# Altium PCB slave.PcbDoc (part 6 of 8)
Units mm, origin at the board's own origin, x right, y up, seen from the top; angles counter-clockwise.
Board outline 160 x 100 mm, 6 copper layers (Top, FUSED_VBAT-, Signals1, Signals2, SUPPLY, Bottom), stack 1.67 mm thick; 582 components, 375 nets, 1615 pads, 3043 vias.
Unrouted connection lines stored in the file: 1.
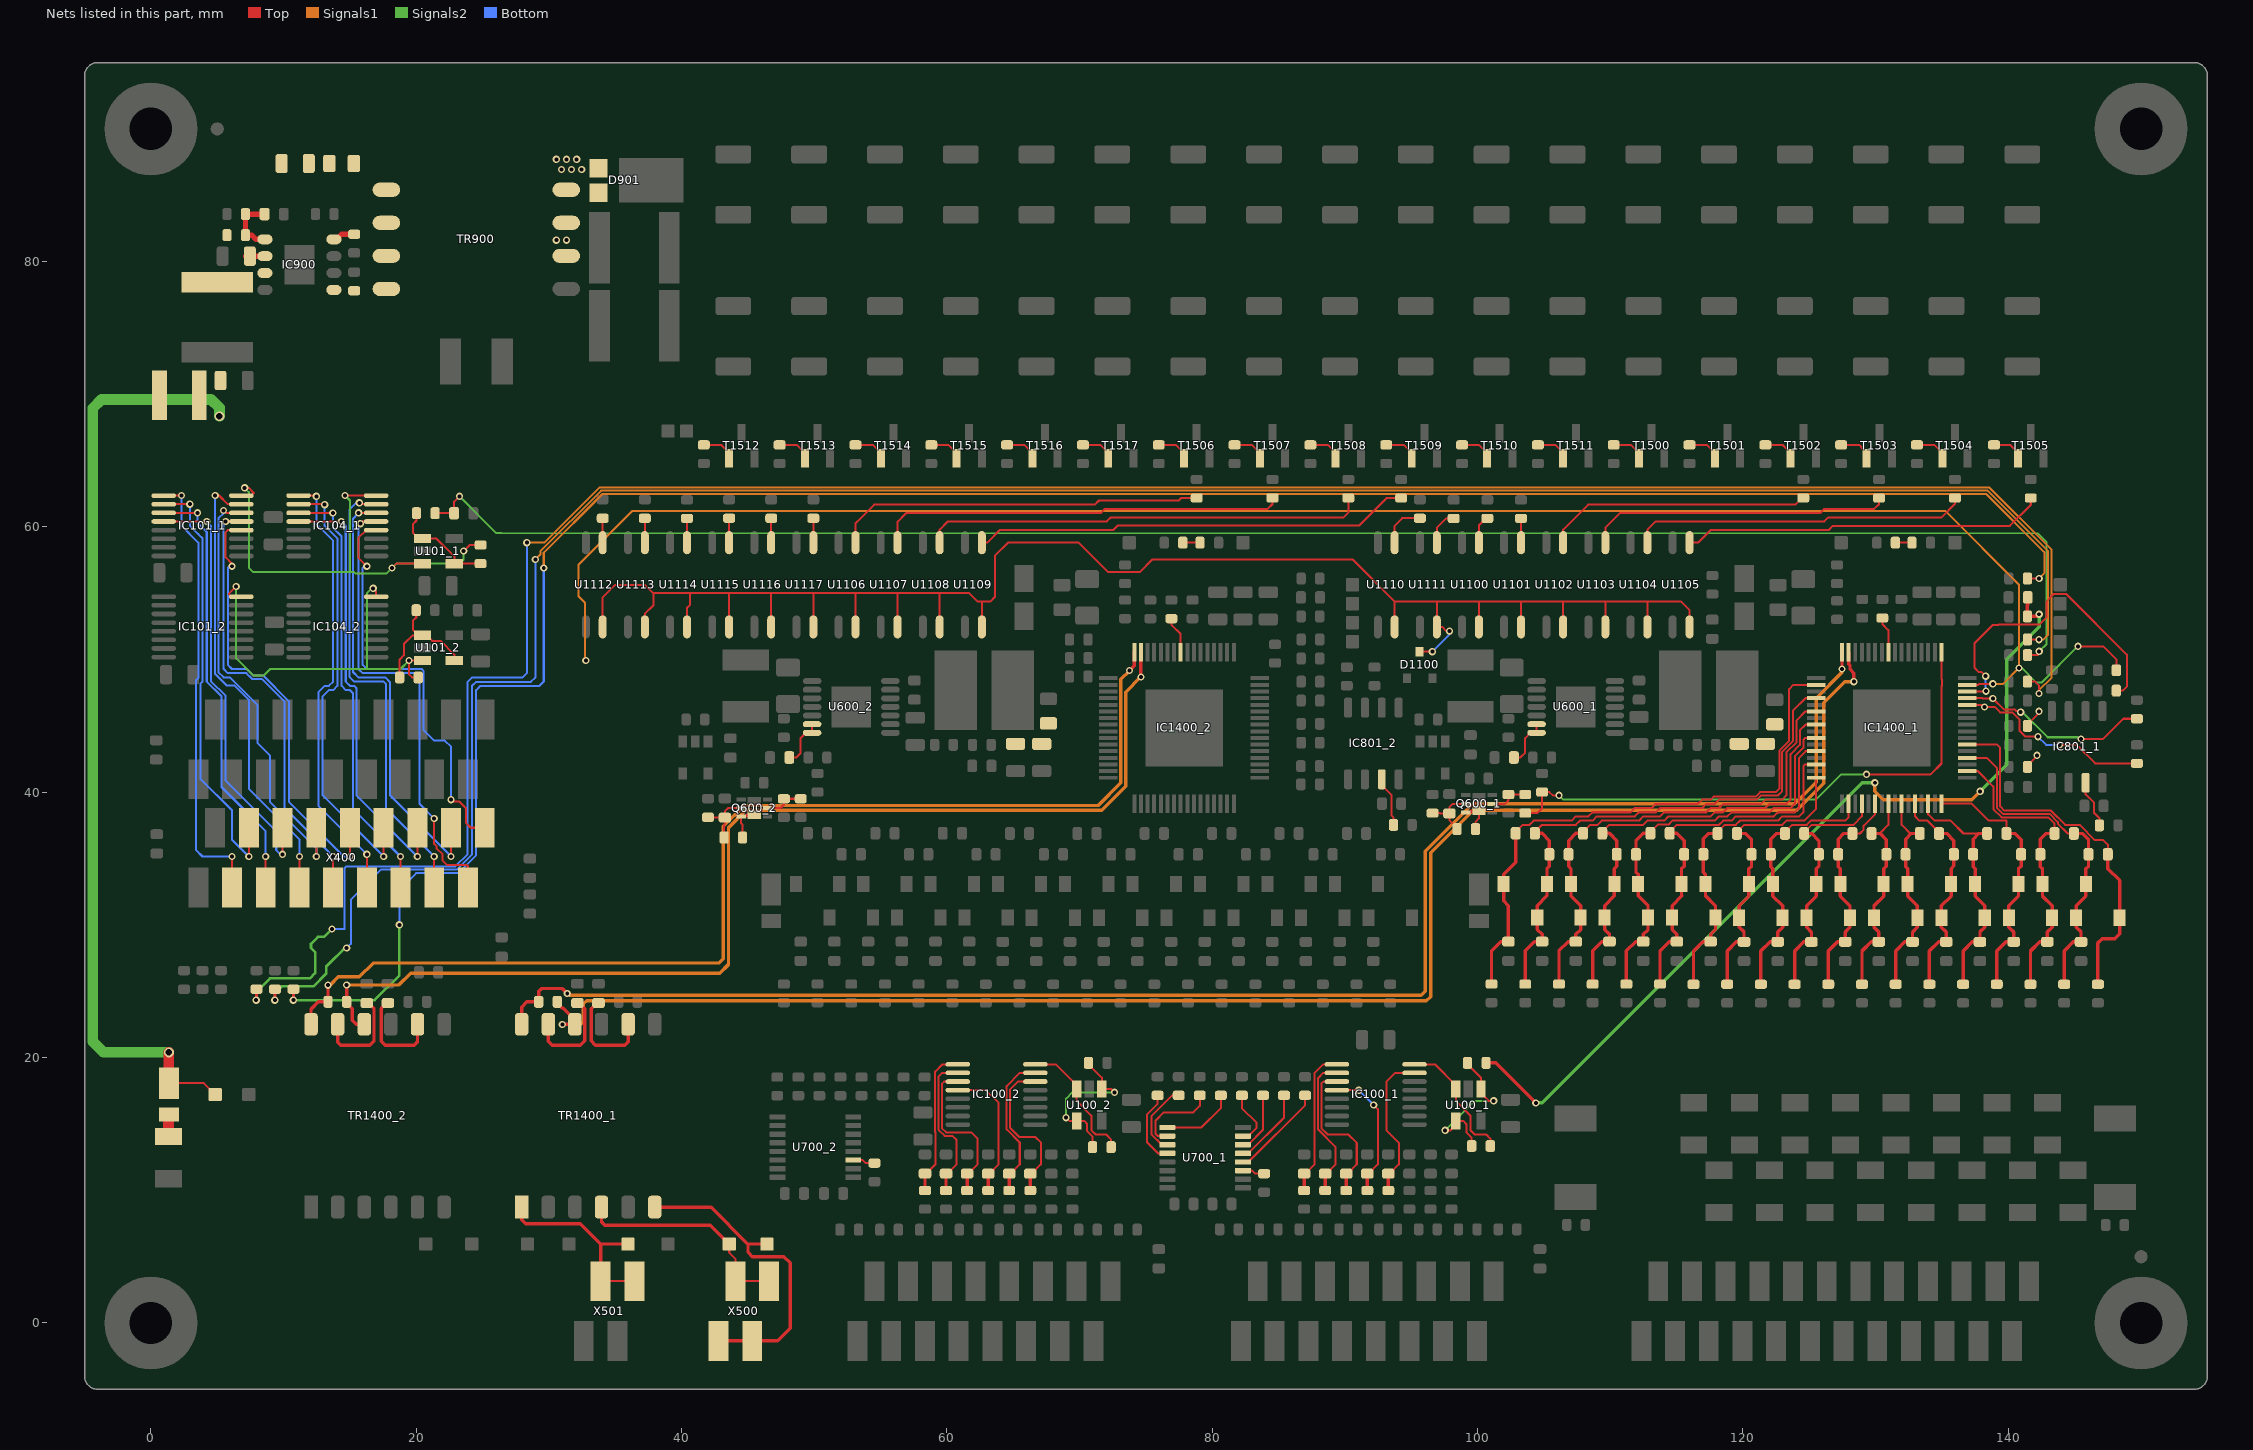
[diagram p9: the nets of this part, all layers, seen from the top]

## Via types
v1: diameter 0.55, hole 0.3, Top to Bottom, tented both sides, 2963 vias
v2: diameter 0.55, hole 0.3, Top to Bottom, 41 vias
v3: diameter 0.75, hole 0.5, Top to Bottom, tented both sides, 22 vias
v4: diameter 0.65, hole 0.4, Top to Bottom, tented both sides, 16 vias
v5: diameter 0.75, hole 0.5, Top to Bottom, 1 vias

## Nets (pads, with @x,y where several pads share a name; then routed paths per layer and width w, separated by ;. In a path a pad name is that pad's centre, name@x,y a point inside that pad or via, vN(x,y) a via of type N, cw(c..) or ccw(c..) an arc to the next point about the centre after c; other vN are vias at no path point) (continued)
NetC110_2_2: C110_2.2 IC100_2.6 R114_2.1 | length 11.8
  Top w0.152: C110_2.2@66.285,11.253 66.385,11.253 67.078,11.947 67.078,13.602 66.67,14.01 65.439,14.01 64.761,14.689 64.761,17.598 65.355,18.192 IC100_2.6@66.67,18.192
  Top w0.254: R114_2.1@66.285,9.98 C110_2.2@66.285,11.253
NetC111_1_2: C111_1.2 IC100_1.7 R115_1.1 | length 11.4
  Top w0.152: C111_1.2@93.272,11.253 93.372,11.253 94.066,11.947 94.066,13.566 93.145,14.487 93.145,18.201 93.786,18.842 IC100_1.7@95.245,18.842
  Top w0.254: R115_1.1@93.272,9.98 C111_1.2@93.272,11.253
NetC111_2_2: C111_2.2 IC100_2.7 R115_2.1 | length 11.2
  Top w0.152: C111_2.2@64.697,11.253 64.797,11.253 65.491,11.947 65.491,13.599 64.507,14.584 64.507,17.843 65.506,18.842 IC100_2.7@66.67,18.842
  Top w0.254: R115_2.1@64.697,9.98 C111_2.2@64.697,11.253
NetC112_1_2: C112_1.2 IC100_1.12 R116_1.1 | length 10.2
  Top w0.152: IC100_1.12@89.395,17.542 91.042,17.542 v1(91.05,17.535) ; C112_1.2@91.685,11.253 91.785,11.253 92.478,11.947 92.478,16.106 v1(92.161,16.423)
  Top w0.254: R116_1.1@91.685,9.98 C112_1.2@91.685,11.253
  Bottom w0.152: v1(91.05,17.535) v1(92.161,16.423)
NetC112_2_2: C112_2.2 IC100_2.12 R116_2.1 | length 10.5
  Top w0.152: IC100_2.12@60.82,17.542 62.943,17.542 63.903,16.582 63.903,11.947 63.21,11.253 C112_2.2@63.11,11.253
  Top w0.254: R116_2.1@63.11,9.98 C112_2.2@63.11,11.253
NetC113_1_2: C113_1.2 IC100_1.11 R117_1.1 | length 11.7
  Top w0.152: IC100_1.11@89.395,18.192 88.368,18.192 88.224,18.048 88.224,14.687 88.71,14.201 90.256,14.201 90.891,13.566 90.891,11.947 90.197,11.253 C113_1.2@90.097,11.253
  Top w0.254: R117_1.1@90.097,9.98 C113_1.2@90.097,11.253
NetC113_2_2: C113_2.2 IC100_2.11 R117_2.1 | length 11.9
  Top w0.152: IC100_2.11@60.82,18.192 59.798,18.192 59.617,18.011 59.617,14.677 59.935,14.36 61.84,14.36 62.316,13.883 62.316,11.947 61.622,11.253 C113_2.2@61.522,11.253
  Top w0.254: R117_2.1@61.522,9.98 C113_2.2@61.522,11.253
NetC114_1_2: C114_1.2 IC100_1.10 R118_1.1 | length 11
  Top w0.152: C114_1.2@88.51,11.253 88.61,11.253 89.303,11.947 89.303,13.248 87.97,14.582 87.97,18.444 88.368,18.842 IC100_1.10@89.395,18.842
  Top w0.254: R118_1.1@88.51,9.98 C114_1.2@88.51,11.253
NetC114_2_2: C114_2.2 IC100_2.10 R118_2.1 | length 11.4
  Top w0.152: C114_2.2@59.935,11.253 60.035,11.253 60.728,11.947 60.728,13.788 60.411,14.106 59.829,14.106 59.363,14.572 59.363,18.551 59.655,18.842 IC100_2.10@60.82,18.842
  Top w0.254: R118_2.1@59.935,9.98 C114_2.2@59.935,11.253
NetC115_1_2: C115_1.2 IC100_1.9 R119_1.1 | length 11.2
  Top w0.152: C115_1.2@86.922,11.253 87.022,11.253 87.716,11.947 87.716,18.84 88.368,19.492 IC100_1.9@89.395,19.492
  Top w0.254: R119_1.1@86.922,9.98 C115_1.2@86.922,11.253
NetC115_2_2: C115_2.2 IC100_2.9 R119_2.1 | length 11.3
  Top w0.152: C115_2.2@58.347,11.253 58.447,11.253 59.141,11.947 59.141,14.36 59.109,14.391 59.109,18.932 59.67,19.492 IC100_2.9@60.82,19.492
  Top w0.254: R119_2.1@58.347,9.98 C115_2.2@58.347,11.253
NetC605_1_2: C605_1.2 C606_1.2 R604_1.2
NetC605_2_2: C605_2.2 C606_2.2 R604_2.2
NetC607_1_1: C607_1.1 U600_1.6 U600_1.7 | length 3.8
  Top w0.152: C607_1.1@102.728,42.617 103.205,42.617 103.576,42.988 103.576,44.077 103.976,44.477 U600_1.7@104.451,44.477 U600_1.6@104.451,45.127
NetC607_2_1: C607_2.1 U600_2.6 U600_2.7 | length 3.8
  Top w0.152: C607_2.1@48.118,42.617 48.648,42.617 48.966,42.935 48.966,44.077 49.366,44.477 U600_2.7@49.841,44.477 U600_2.6@49.841,45.127
NetC608_1_2: C608_1.2 Q600_1.5 R607_1.1 R608_1.2 | length 4.5
  Top w0.152: R607_1.1@96.606,38.425 97.157,38.425 97.182,38.4 C608_1.2@97.876,38.4 ; R608_1.2@98.446,37.22 98.446,37.32 97.876,37.89 C608_1.2@97.876,38.4 ; Q600_1.5@99.103,39.124 98.124,39.124 97.876,38.876 C608_1.2@97.876,38.4
NetC608_2_2: C608_2.2 Q600_2.5 R607_2.1 R608_2.2 | length 4.6
  Top w0.152: R607_2.1@41.993,38.107 42.664,38.107 42.689,38.082 C608_2.2@43.266,38.082 ; R608_2.2@43.201,36.585 43.201,37.541 43.266,37.606 C608_2.2@43.266,38.082 ; Q600_2.5@44.493,38.807 43.514,38.807 43.266,38.559 C608_2.2@43.266,38.082
NetC900_2: C900.2 D900.2 L900.1 TP901.1 | length 70.7
  Top w0.152: D900.2@1.356,18.067 3.998,18.067 TP901.1@4.848,17.217
  Top w0.813: D900.2@1.356,18.067 v3(1.356,20.392)
  Signals2 w0.813: v3(1.356,20.392) -3.565,20.392 -4.385,21.211 -4.385,68.944 -3.724,69.605 4.531,69.605 5.166,68.97 v3(5.166,68.335)
NetC902_2: C902.2 C905.2 IC900.3 L900.2 R900.2 TR900.3 TR900.4
NetC903_2: C903.2 IC900.1 R900.1 R901.2 | length 4.6
  Top w0.406: C903.2@8.568,83.575 R901.2@7.136,83.575 7.136,82.539 R900.1@7.136,81.987 7.606,81.987 7.924,81.67 IC900.1@8.597,81.67
NetC904_2: C904.2 IC900.2 | length 1.4
  Top w0.406: C904.2@7.161,80.4 IC900.2@8.597,80.4
NetC905_1: C905.1 R903.2
NetC1404_1_2: C1404_1.2 TR1400_1.8 | length 7.5
  Top w0.254: C1404_1.2@33.741,24.112 33.641,24.112 33.201,23.672 33.201,21.249 33.512,20.939 35.716,20.939 35.973,21.196 TR1400_1.8@35.973,22.509
NetC1404_2_2: C1404_2.2 TR1400_2.8 | length 7.4
  Top w0.254: C1404_2.2@17.866,24.112 17.766,24.112 17.355,23.702 17.355,21.246 17.663,20.939 19.841,20.939 20.098,21.196 TR1400_2.8@20.098,22.509
NetC1405_1_2: C1405_1.2 TR1400_1.11 | length 7.4
  Top w0.254: TR1400_1.11@29.954,22.509 29.954,21.233 30.248,20.939 32.382,20.939 32.697,21.253 32.697,23.669 32.253,24.112 C1405_1.2@32.153,24.112
NetC1405_2_2: C1405_2.2 TR1400_2.11 | length 7.5
  Top w0.254: TR1400_2.11@14.079,22.509 14.079,21.163 14.303,20.939 16.507,20.939 16.822,21.253 16.822,23.669 16.378,24.112 C1405_2.2@16.278,24.112
NetD900_1: D900.1 F900.2 | length 1.7
  Top w0.813: F900.2@1.336,14.045 1.336,15.045 1.356,15.066 D900.1@1.356,15.692
NetD901_2: D901.2 D901.3 TR900.5
  other v1: 30.947,86.94 31.709,86.94 32.471,86.94 30.566,87.702 31.328,87.702 32.09,87.702
NetD1100_3: D1100.3 U1100.4 U1101.4 U1102.4 U1103.4 U1104.4 U1105.4 U1106.4 U1107.4 U1108.4 U1109.4 U1110.4 U1111.4 U1112.4 U1113.4 U1114.4 U1115.4 U1116.4 U1117.4 | length 133
  Top w0.152: U1112.4@34.058,52.46 34.058,54.682 35.011,55.635 37.233,55.635 37.868,55 ; U1113.4@37.233,52.46 37.233,53.436 37.868,54.071 37.868,55 ; U1114.4@40.408,52.46 40.408,53.898 40.645,54.135 40.645,54.919 40.726,55 ; U1115.4@43.583,52.46 43.583,55 ; U1116.4@46.758,52.46 46.758,55 ; U1117.4@49.933,52.46 49.933,55 ; U1106.4@53.108,52.46 53.108,55 ; U1107.4@56.283,52.46 56.283,55 ; U1108.4@59.458,52.46 59.458,55 ; U1109.4@62.633,52.46 62.633,54.365 ; U1110.4@93.748,52.46 93.748,54.365 ; D1100.3@95.633,50.59 v1(96.583,50.59) ; v1(97.876,52.142) 97.642,52.142 97.325,52.46 U1111.4@96.923,52.46 96.923,54.365 ; U1100.4@100.098,52.46 100.098,54.365 ; U1101.4@103.273,52.46 103.273,54.365 ; U1102.4@106.448,52.46 106.448,54.365 ; U1103.4@109.623,52.46 109.623,54.365 ; U1104.4@112.798,52.46 112.798,54.365 ; U1105.4@115.973,52.46 115.973,53.73 115.338,54.365 112.798,54.365 ; 37.868,55 40.726,55 ; 40.726,55 43.583,55 ; 43.583,55 46.758,55 ; 46.758,55 49.933,55 ; 49.933,55 53.108,55 ; 53.108,55 56.283,55 ; 56.283,55 59.458,55 ; 59.458,55 61.681,55 62.316,54.365 62.633,54.365 ; 62.633,54.365 63.268,54.365 63.616,54.713 63.616,57.824 64.602,58.81 69.936,58.81 72.158,56.587 74.54,56.587 75.492,57.54 90.573,57.54 93.748,54.365 ; 93.748,54.365 96.923,54.365 ; 96.923,54.365 100.098,54.365 ; 100.098,54.365 103.273,54.365 ; 103.273,54.365 106.448,54.365 ; 106.448,54.365 109.623,54.365 ; 109.623,54.365 112.798,54.365
  Bottom w0.152: v1(96.583,50.59) 97.876,51.882 v1(97.876,52.142)
NetIC801_1_7: IC801_1.7 R801_1.1 | length 3.6
  Top w0.152: IC801_1.7@145.818,40.711 145.818,39.859 146.059,39.619 146.067,39.619 146.453,39.232 146.453,38.468 146.865,38.057 R801_1.1@146.865,37.505
NetIC801_2_7: IC801_2.7 R801_2.1 | length 3.8
  Top w0.152: IC801_2.7@92.776,40.972 92.776,40.522 93.516,39.782 93.516,38.236 93.663,38.089 R801_2.1@93.663,37.537
NetIC900_5: IC900.5 R903.1 R904.2 TR900.1 TR900.2
NetIC900_8: IC900.8 R902.1 | length 1.7
  Top w0.406: IC900.8@13.8,81.67 13.991,81.67 14.374,82.052 R902.1@15.326,82.052
NetIC1400_1_57: IC1400_1.57 R1402_1.2 | length 2.8
  Top w0.152: R1402_1.2@130.502,53.13 130.502,52.678 130.963,52.217 IC1400_1.57@130.963,50.54
NetIC1400_2_57: IC1400_2.57 R1402_2.2 | length 2.8
  Top w0.152: R1402_2.2@76.921,53.08 76.921,52.628 77.623,51.926 IC1400_2.57@77.623,50.54
NetLD1400_1_1: LD1400_1.1 R1403_1.2 | length 1.3
  Top w0.152: R1403_1.2@131.486,58.81 132.284,58.81 LD1400_1.1@132.736,58.81
NetLD1400_2_1: LD1400_2.1 R1403_2.2 | length 1.3
  Top w0.152: R1403_2.2@77.78,58.81 LD1400_2.1@79.078,58.81
NetQ600_1_2: Q600_1.2 R605_1.2 R606_1.2 | length 3.1
  Top w0.152: Q600_1.2@101.093,39.124 102.072,39.124 102.321,39.373 R606_1.2@102.321,39.825 R605_1.2@103.591,39.825
NetQ600_1_6: Q600_1.6 Q600_1.7 R608_1.1 | length 2.8
  Top w0.152: Q600_1.6@99.103,38.474 99.555,38.474 99.497,38.533 99.497,38.634 Q600_1.7@100.098,38.634 100.098,38.024 99.846,37.771 R608_1.1@99.846,37.22
NetQ600_2_2: Q600_2.2 R605_2.2 R606_2.2 | length 3.1
  Top w0.152: Q600_2.2@46.483,38.807 47.462,38.807 47.711,39.056 R606_2.2@47.711,39.507 R605_2.2@48.981,39.507
NetQ600_2_6: Q600_2.6 Q600_2.7 R608_2.1 | length 2.9
  Top w0.152: R608_2.1@44.601,36.585 44.601,37.537 44.493,37.645 Q600_2.6@44.493,38.157 44.945,38.157 44.887,38.215 44.887,38.317 Q600_2.7@45.488,38.317
NetR108_1_1: R108_1.1 R110_1.2 U100_1.1 U100_1.4 | length 12.5
  Top w0.152: v1(97.558,14.518) 97.575,14.502 97.933,14.502 98.355,14.923 U100_1.4@98.355,15.223 98.917,15.223 99.146,14.995 99.146,14.36 99.555,13.951 R110_1.2@99.555,13.339 ; R108_1.1@99.24,19.598 99.24,19.498 100.255,18.483 U100_1.1@100.255,17.623 100.255,17.323 100.837,16.741 v1(101.21,16.741)
  Signals2 w0.152: v1(97.558,14.518) 99.781,16.741 v1(101.21,16.741)
NetR108_2_1: R108_2.1 R110_2.2 U100_2.1 U100_2.4 | length 12.5
  Top w0.152: v1@69.08,15.471 v1(68.983,15.471) 69.231,15.223 U100_2.4@69.78,15.223 70.342,15.223 70.571,14.995 70.571,14.451 70.98,14.042 R110_2.2@70.98,13.248 ; R108_2.1@70.665,19.598 70.665,19.498 71.68,18.483 U100_2.1@71.68,17.623 72.387,17.623 v1(72.635,17.376)
  Signals2 w0.152: v1(68.983,15.471) 68.983,16.9 69.46,17.376 v1(72.635,17.376)
NetR109_1_1: R109_1.1 R111_1.2 U101_1.1 U101_1.4 | length 8
  Top w0.152: R109_1.1@20.023,61.032 20.023,60.481 19.754,60.211 19.754,59.546 20.176,59.125 U101_1.1@20.476,59.125 21.52,59.125 22.876,57.768 U101_1.4@22.876,57.225 24.294,57.225 24.299,57.23 R111_1.2@24.851,57.23
NetR109_2_1: R109_2.1 R111_2.2 U101_2.1 U101_2.4 | length 10
  Top w0.152: R111_2.2@18.753,48.65 18.753,50.004 19.072,50.323 19.072,51.17 19.724,51.822 U101_2.1@20.176,51.822 ; R109_2.1@20.003,53.717 20.003,53.166 19.754,52.916 19.754,52.244 U101_2.1@20.176,51.822 ; U101_2.4@22.876,49.922 22.876,50.374 21.849,51.4 21.198,51.4 20.776,51.822 U101_2.1@20.476,51.822 U101_2.1@20.176,51.822
NetR708_1_2: R708_1.2 U700_1.3 | length 1.7
  Top w0.152: U700_1.3@82.311,11.48 83.012,11.48 83.242,11.25 R708_1.2@83.906,11.25
NetR708_2_2: R708_2.2 U700_2.3 | length 1.7
  Top w0.152: U700_2.3@52.942,12.273 53.644,12.273 53.874,12.043 R708_2.2@54.537,12.043
NetR1100_2: R1100.2 U1100.1 | length 2.1
  Top w0.152: U1100.1@100.098,58.81 100.098,60.102 100.633,60.637 R1100.2@100.733,60.637
NetR1101_2: R1101.2 U1101.1 | length 1.8
  Top w0.152: U1101.1@103.273,58.81 R1101.2@103.273,60.637
NetR1102_2: R1102.2 U1102.1 | length 20.1
  Top w0.152: U1102.1@106.448,58.81 106.448,59.786 108.329,61.667 123.941,61.667 124.446,62.172 R1102.2@124.546,62.172
NetR1103_2: R1103.2 U1103.1 | length 23
  Top w0.152: U1103.1@109.623,58.81 109.623,59.935 110.721,61.032 125.816,61.032 126.133,61.35 129.89,61.35 130.261,61.721 R1103.2@130.261,62.172
NetR1104_2: R1104.2 U1104.1 | length 25.4
  Top w0.152: U1104.1@112.798,58.81 112.798,59.786 113.422,60.41 126.133,60.41 126.438,60.715 134.97,60.715 135.976,61.721 R1104.2@135.976,62.172
NetR1105_2: R1105.2 U1105.1 | length 27.4
  Top w0.152: U1105.1@115.973,58.81 116.608,58.81 117.561,59.762 126.451,59.762 126.756,60.067 140.114,60.067 141.691,61.644 R1105.2@141.691,62.172
NetR1106_2: R1106.2 U1106.1 | length 28
  Top w0.152: U1106.1@53.108,58.81 53.108,60.264 53.232,60.388 54.511,61.667 71.143,61.667 71.461,61.985 77.465,61.985 77.652,62.172 R1106.2@78.826,62.172
NetR1107_2: R1107.2 U1107.1 | length 30.8
  Top w0.152: U1107.1@56.283,58.81 56.283,60.397 56.918,61.032 71.601,61.032 71.918,61.35 84.17,61.35 84.541,61.721 R1107.2@84.541,62.172
NetR1108_2: R1108.2 U1108.1 | length 33.4
  Top w0.152: U1108.1@59.458,58.81 59.458,59.786 60.082,60.41 72.061,60.41 72.366,60.715 89.901,60.715 90.256,61.07 R1108.2@90.256,62.172
NetR1109_2: R1109.2 U1109.1 | length 33
  Top w0.152: U1109.1@62.633,58.81 63.035,58.81 63.987,59.762 72.543,59.762 72.884,60.103 91.08,60.103 93.149,62.172 R1109.2@94.241,62.172
NetR1110_2: R1110.2 U1110.1 | length 3.4
  Top w0.152: U1110.1@93.748,58.81 93.748,60.08 94.318,60.65 R1110.2@95.648,60.65
NetR1111_2: R1111.2 U1111.1 | length 2.7
  Top w0.152: U1111.1@96.923,58.81 96.923,59.786 96.923,59.919 97.642,60.637 R1111.2@98.193,60.637
NetR1112_2: R1112.2 U1112.1 | length 1.8
  Top w0.152: U1112.1@34.058,58.81 R1112.2@34.058,60.65
NetR1113_2: R1113.2 U1113.1 | length 1.8
  Top w0.152: U1113.1@37.233,58.81 R1113.2@37.233,60.65
NetR1114_2: R1114.2 U1114.1 | length 1.8
  Top w0.152: U1114.1@40.408,58.81 R1114.2@40.408,60.637
NetR1115_2: R1115.2 U1115.1 | length 1.8
  Top w0.152: U1115.1@43.583,58.81 R1115.2@43.583,60.65
NetR1116_2: R1116.2 U1116.1 | length 1.8
  Top w0.152: U1116.1@46.758,58.81 R1116.2@46.758,60.65
NetR1117_2: R1117.2 U1117.1 | length 1.8
  Top w0.152: U1117.1@49.933,58.81 R1117.2@49.933,60.65
NetR1512_1: R1512.1 T1500.1 | length 2.2
  Top w0.152: R1512.1@110.576,66.177 111.551,66.177 112.166,65.562 T1500.1@112.166,65.162
NetR1513_1: R1513.1 T1501.1 | length 2.3
  Top w0.152: R1513.1@116.271,66.177 117.266,66.177 117.881,65.562 T1501.1@117.881,65.162
NetR1514_1: R1514.1 T1502.1 | length 2.3
  Top w0.152: R1514.1@121.987,66.177 122.981,66.177 123.596,65.562 T1502.1@123.596,65.162
NetR1515_1: R1515.1 T1503.1 | length 2.3
  Top w0.152: R1515.1@127.721,66.177 128.757,66.177 128.951,65.983 128.951,65.934 129.323,65.562 T1503.1@129.323,65.162
NetR1516_1: R1516.1 T1504.1 | length 2.2
  Top w0.152: R1516.1@133.463,66.177 134.411,66.177 135.026,65.562 T1504.1@135.026,65.162
NetR1517_1: R1517.1 T1505.1 | length 2.5
  Top w0.152: R1517.1@138.924,66.177 140.126,66.177 140.741,65.562 T1505.1@140.741,65.162
NetR1530_1: R1530.1 T1506.1 | length 2.2
  Top w0.152: R1530.1@76.286,66.177 77.261,66.177 77.876,65.562 T1506.1@77.876,65.162
NetR1531_1: R1531.1 T1507.1 | length 2.2
  Top w0.152: R1531.1@82.001,66.177 82.976,66.177 83.591,65.562 T1507.1@83.591,65.162
NetR1532_1: R1532.1 T1508.1 | length 2.2
  Top w0.152: R1532.1@87.716,66.177 88.691,66.177 89.306,65.562 T1508.1@89.306,65.162
NetR1533_1: R1533.1 T1509.1 | length 2.3
  Top w0.152: R1533.1@93.411,66.177 94.421,66.177 95.036,65.562 T1509.1@95.036,65.162
NetR1534_1: R1534.1 T1510.1 | length 2.2
  Top w0.152: R1534.1@99.146,66.177 100.101,66.177 100.716,65.562 T1510.1@100.716,65.162
NetR1535_1: R1535.1 T1511.1 | length 2.2
  Top w0.152: R1535.1@104.861,66.177 105.836,66.177 106.451,65.562 T1511.1@106.451,65.162
NetR1548_1: R1548.1 T1512.1 | length 2.2
  Top w0.152: R1548.1@41.996,66.177 42.971,66.177 43.586,65.562 T1512.1@43.586,65.162
NetR1549_1: R1549.1 T1513.1 | length 2.2
  Top w0.152: R1549.1@47.711,66.177 48.686,66.177 49.301,65.562 T1513.1@49.301,65.162
NetR1550_1: R1550.1 T1514.1 | length 2.2
  Top w0.152: R1550.1@53.426,66.177 54.401,66.177 55.016,65.562 T1514.1@55.016,65.162
NetR1551_1: R1551.1 T1515.1 | length 2.2
  Top w0.152: R1551.1@59.141,66.177 60.116,66.177 60.731,65.562 T1515.1@60.731,65.162
NetR1552_1: R1552.1 T1516.1 | length 2.2
  Top w0.152: R1552.1@64.856,66.177 65.831,66.177 66.446,65.562 T1516.1@66.446,65.162
NetR1553_1: R1553.1 T1517.1 | length 2.2
  Top w0.152: R1553.1@70.571,66.177 71.546,66.177 72.161,65.562 T1517.1@72.161,65.162
NetTR900_6: TR900.6 TR900.7
  other v1: 30.566,81.606 31.328,81.606
OPA_TEMP_1: IC100_1.8 R110_1.1 U100_1.3 | length 9.9
  Top w0.152: IC100_1.8@95.245,19.492 96.786,19.492 98.355,17.923 U100_1.3@98.355,17.623 98.355,16.738 99.463,15.63 99.463,14.518 99.781,14.201 100.644,14.201 100.955,13.89 R110_1.1@100.955,13.339
OPA_TEMP_2: IC100_2.8 R110_2.1 U100_2.3 | length 10
  Top w0.152: IC100_2.8@66.67,19.492 68.211,19.492 69.78,17.923 U100_2.3@69.78,17.623 69.78,16.738 70.888,15.63 70.888,14.518 71.206,14.201 72,14.201 72.38,13.821 R110_2.1@72.38,13.248
OPA_USER_1: IC101_1.8 IC104_1.8 R111_1.1 U101_1.3 | length 37.7
  Top w0.152: IC101_1.8@6.821,62.355 7.571,62.355 7.766,62.55 7.38,62.937 v1(7.071,62.937) ; v1@14.642,62.38 v1(14.627,62.366) 15.943,62.366 15.954,62.355 IC104_1.8@16.962,62.355 ; IC104_1.8@16.937,62.38 IC104_1.8@16.962,62.355 ; IC104_1.8@16.981,62.355 IC104_1.8@16.962,62.355 ; v1@18.193,56.895 v1(18.183,56.905) 18.503,57.225 U101_1.3@20.476,57.225 ; v1(23.581,58.175) 24.036,58.63 R111_1.1@24.851,58.63
  Signals2 w0.152: v1(7.071,62.937) 7.388,62.62 7.388,56.905 7.706,56.587 15.008,56.587 ; v1(14.627,62.366) 15.008,61.985 15.008,56.587 ; v1(23.581,58.175) 23.581,57.54 23.263,57.222 18.501,57.222 v1(18.183,56.905) 17.754,56.475 15.438,56.475 15.326,56.587 15.008,56.587
OPA_USER_2: IC101_2.8 IC104_2.8 R111_2.1 U101_2.3 | length 31.2
  Top w0.152: v1(6.436,55.51) 5.875,54.949 5.875,54.93 6.071,54.735 IC101_2.8@6.821,54.735 ; v1(16.755,55.365) 16.981,55.139 IC104_2.8@16.981,54.735 ; R111_2.1@20.153,48.65 19.702,48.65 19.453,48.898 v1(19.453,49.92) 19.456,49.922 U101_2.3@20.476,49.922
  Signals2 w0.152: v1(6.436,55.51) 6.436,50.088 7.73,48.794 8.518,48.794 9.009,49.285 16.278,49.285 ; v1(16.755,55.365) 16.644,55.365 16.278,55 16.278,49.285 ; v1(19.453,49.92) 18.818,49.285 16.278,49.285
OUT_N1_1: IC1400_1.63 R1418_1.2 TR1400_1.10 | length 124.4
  Top w0.254: R1418_1.2@30.631,24.202 30.631,24.102 31.001,23.732 31.087,23.732 31.96,22.858 TR1400_1.10@31.96,22.509 31.032,22.509 v1(31.01,22.488) ; IC1400_1.63@127.963,50.54 127.963,49.64 128.069,49.535 128.069,49.254 128.356,48.967 v1(128.356,48.332)
  Signals1 w0.254: v1@30.991,22.488 v1(31.01,22.488) 32.368,22.488 32.603,22.723 32.603,24.043 32.839,24.279 32.903,24.279 96.141,24.279 96.459,24.596 96.459,35.442 99.659,38.642 124.063,38.642 126.081,40.66 126.081,46.754 127.659,48.332 v1(128.356,48.332)
OUT_N1_2: IC1400_2.63 R1418_2.2 TR1400_2.10 | length 85.5
  Top w0.254: v1(14.756,25.472) R1418_2.2@14.756,24.202 14.756,24.102 15.167,23.691 15.167,22.818 15.476,22.509 TR1400_2.10@16.085,22.509 ; v1(74.623,48.684) IC1400_2.63@74.623,50.59
  Signals1 w0.254: v1(14.756,25.472) 18.704,25.472 19.593,26.361 42.885,26.361 43.538,27.014 43.538,37.324 44.856,38.642 71.676,38.642 73.466,40.433 73.466,47.527 v1(74.623,48.684)
OUT_P1_1: IC1400_1.64 R1418_1.1 TR1400_1.12 | length 123.6
  Top w0.254: TR1400_1.12@27.947,22.509 27.947,23.806 28.343,24.202 R1418_1.1@29.231,24.202 29.231,24.987 29.448,25.204 30.991,25.204 31.374,24.821 v1(31.385,24.821) ; v1(127.463,49.285) IC1400_1.64@127.463,50.54
  Signals1 w0.254: v1(31.385,24.821) 31.385,24.867 31.568,24.685 31.836,24.685 95.735,24.685 96.052,25.002 96.052,35.538 99.639,39.125 123.911,39.125 125.526,40.74 125.526,47.09 127.463,49.027 v1(127.463,49.285)
OUT_P1_2: IC1400_2.64 R1418_2.1 TR1400_2.12 | length 86.3
  Top w0.254: TR1400_2.12@12.072,22.509 12.072,23.647 12.627,24.202 R1418_2.1@13.356,24.202 v1(13.356,25.46) ; v1@73.768,49.035 v1(73.768,49.169) 74.123,49.525 IC1400_2.64@74.123,50.59
  Signals1 w0.254: v1(13.356,25.46) 13.502,25.46 14.12,26.077 15.709,26.077 16.755,27.123 42.814,27.123 43.131,27.441 43.131,37.42 44.709,38.998 71.396,38.998 73.111,40.712 73.111,48.512 v1(73.768,49.169)
PRIMARY-ANALOG-IN_0: IC104_1.4 X400.1 | length 31.3
  Top w0.152: v1(16.278,57.03) 15.643,57.665 15.643,59.167 16.231,59.755 IC104_1.4@16.981,59.755 ; v2@22.787,39.283 23.263,39.283 23.74,38.807 23.74,37.696 24.058,37.378 24.115,37.32 X400.1@25.168,37.32
  Bottom w0.152: v1(16.278,57.03) 16.086,57.03 15.961,56.905 15.961,49.602 16.278,49.285 20.405,49.285 20.565,49.125 20.565,44.681 21.358,43.887 22.152,43.887 22.628,43.411 v2(22.628,39.442)
PRIMARY-ANALOG-IN_1: IC104_1.5 X400.2 | length 35.4
  Top w0.152: v1(15.789,60.24) 15.954,60.405 IC104_1.5@16.981,60.405 ; v2(21.358,38.013) 21.358,36.108 21.517,35.95 21.517,35.791 21.993,35.315 21.993,34.838 22.311,34.521 23.799,34.521 23.898,34.422 X400.2@23.898,32.82
  Bottom w0.152: v1(15.789,60.24) 15.643,60.094 15.643,49.285 15.961,48.967 20.088,48.967 20.247,48.808 20.247,39.125 v2(21.358,38.013)
PRIMARY-ANALOG-IN_2: IC104_1.6 X400.3 | length 33.8
  Top w0.152: v1(15.666,61.055) IC104_1.6@16.981,61.055 ; IC104_1.6@16.939,61.032 IC104_1.6@16.951,61.045 ; v2(22.628,35.156) X400.3@22.628,37.32
  Bottom w0.152: v1(15.666,61.055) 15.235,60.624 15.235,49.058 15.643,48.65 17.662,48.65 18.025,48.287 18.025,39.76 v2(22.628,35.156)
PRIMARY-ANALOG-IN_3: IC104_1.7 X400.4 | length 34.7
  Top w0.152: v1(15.717,61.808) 15.815,61.808 15.833,61.826 15.954,61.705 IC104_1.7@16.981,61.705 ; X400.4@21.358,32.82 v2(21.358,35.156)
  Bottom w0.152: v1(15.717,61.808) 15.503,61.808 15.485,61.826 14.981,61.322 14.981,48.677 15.326,48.332 17.547,48.332 17.707,48.173 ; 17.707,48.173 17.707,38.807 v2(21.358,35.156)
PRIMARY-ANALOG-IN_4: IC104_1.12 X400.5 | length 33.2
  Top w0.152: IC104_1.12@11.131,60.405 14.346,60.405 v1(14.351,60.41) ; v2(20.088,35.156) X400.5@20.088,37.32
  Bottom w0.152: v1(14.351,60.41) 14.361,60.41 14.691,60.08 14.691,48.332 15.008,48.015 15.326,48.015 15.485,47.856 15.485,39.76 v2(20.088,35.156)
PRIMARY-ANALOG-IN_5: IC104_1.11 X400.6 | length 33.1
  Top w0.152: IC104_1.11@11.131,61.055 13.703,61.055 v1(13.713,61.045) ; X400.6@18.818,32.82 v2(18.818,35.156)
  Bottom w0.152: v1(13.713,61.045) 13.713,59.934 14.373,59.273 14.373,48.015 14.691,47.697 15.008,47.697 15.231,47.475 15.231,38.744 v2(18.818,35.156)
PRIMARY-ANALOG-IN_6: IC104_1.10 X400.7 | length 33.6
  Top w0.152: IC104_1.10@11.16,61.705 13.065,61.705 v1(13.103,61.667) ; v2(17.548,35.156) X400.7@17.548,37.32
  Bottom w0.152: v1(13.103,61.667) 13.103,60.08 14.056,59.127 14.056,48.015 13.738,47.697 13.421,47.697 12.945,47.221 12.945,39.76 v2(17.548,35.156)
PRIMARY-ANALOG-IN_7: IC104_1.9 X400.8 | length 33.5
  Top w0.152: IC104_1.9@11.131,62.355 12.416,62.355 v1(12.468,62.302) ; X400.8@16.278,32.82 v2(16.278,35.315)
  Bottom w0.152: v1(12.468,62.302) 12.468,60.226 13.738,58.956 13.738,48.332 13.421,48.015 13.103,48.015 12.627,47.538 12.627,38.966 v2(16.278,35.315)
PRIMARY-ANALOG-IN_8: IC101_1.4 X400.9 | length 33.5
  Top w0.152: v1(6.118,57.03) 6.118,57.222 5.642,57.698 5.642,59.581 5.794,59.733 5.794,59.755 IC101_1.4@6.821,59.755 ; v2(15.008,35.156) X400.9@15.008,37.32
  Bottom w0.152: v1(6.118,57.03) 5.926,57.03 5.801,56.905 5.801,49.602 6.118,49.285 7.239,49.285 7.73,48.794 8.457,48.794 10.405,46.846 10.405,39.283 14.532,35.156 v2(15.008,35.156)
PRIMARY-ANALOG-IN_9: IC101_1.5 X400.10 | length 33.5
  Top w0.152: v1(5.642,60.397) 5.787,60.397 5.794,60.405 IC101_1.5@6.821,60.405 ; X400.10@13.738,32.82 v2(13.738,35.156)
  Bottom w0.152: v1(5.642,60.397) 5.483,60.238 5.483,49.285 5.801,48.967 7.198,48.967 7.625,48.54 8.352,48.54 10.087,46.805 10.087,38.807 v2(13.738,35.156)
PRIMARY-ANALOG-IN_10: IC101_1.6 X400.11 | length 33.2
  Top w0.152: v1(5.483,61.236) 5.665,61.055 IC101_1.6@6.821,61.055 ; v2(12.468,35.156) X400.11@12.468,37.32
  Bottom w0.152: v1(5.483,61.236) 5.483,61.032 5.088,60.636 5.088,49.045 5.483,48.65 5.96,48.65 8.023,46.586 8.023,43.728 8.976,42.776 8.976,39.283 12.468,35.791 v2(12.468,35.156)
PRIMARY-ANALOG-IN_11: IC101_1.7 X400.12 | length 34.8
  Top w0.152: v1(4.848,62.366) 5.138,62.366 5.799,61.705 IC101_1.7@6.821,61.705 ; X400.12@11.198,32.82 v2(11.198,35.156)
  Bottom w0.152: v1(4.848,62.366) 4.834,62.351 4.834,48.94 5.742,48.032 6.32,48.032 7.388,46.963 7.388,40.249 11.198,36.439 v2(11.198,35.156)
PRIMARY-ANALOG-IN_12: IC101_1.12 X400.13 | length 32.8
  Top w0.152: IC101_1.12@0.971,60.405 4.195,60.405 4.201,60.41 v1(4.213,60.397) ; v2(9.928,35.315) X400.13@9.928,37.32
  Bottom w0.152: v1(4.213,60.397) 4.531,60.08 4.531,48.374 5.642,47.263 5.642,40.871 9.452,37.061 9.452,35.632 9.786,35.298 9.912,35.298 v2(9.928,35.315)
PRIMARY-ANALOG-IN_13: IC101_1.11 X400.14 | length 32.9
  Top w0.152: IC101_1.11@0.971,61.055 1.997,61.055 2.007,61.045 3.507,61.045 v1(3.515,61.052) ; X400.14@8.658,32.82 v2(8.658,35.156)
  Bottom w0.152: v1(3.515,61.052) 3.515,60.312 4.213,59.613 4.213,48.332 5.325,47.221 5.325,40.395 8.658,37.061 v2(8.658,35.156)
PRIMARY-ANALOG-IN_14: IC101_1.10 X400.15 | length 32.7
  Top w0.152: IC101_1.10@0.971,61.705 1.997,61.705 ; 1.998,61.705 v1(2.941,61.705) ; v2(7.388,35.156) X400.15@7.388,37.32
  Bottom w0.152: v1(2.941,61.705) 2.941,60.078 3.574,59.445 3.578,59.445 3.896,59.127 3.896,48.332 3.737,48.173 3.737,41.03 6.118,38.648 6.118,36.426 v2(7.388,35.156)
PRIMARY-ANALOG-IN_15: IC101_1.9 X400.16 | length 33.9
  Top w0.152: IC101_1.9@0.971,62.355 1.997,62.355 2.008,62.366 v1(2.312,62.366) ; X400.16@6.118,32.82 v2(6.118,35.156)
  Bottom w0.152: v1(2.312,62.366) 2.312,60.076 3.578,58.81 3.578,48.609 3.42,48.45 3.42,35.632 3.896,35.156 v2(6.118,35.156)
PRIMARY-C0: C1311_1.2 IC1400_1.38 R1306_1.2 Z1305_1.2 | length 28.4
  Top w0.152: IC1400_1.38@136.913,43.59 137.021,43.59 139.151,43.59 139.388,43.353 139.388,38.929 139.701,38.617 143.217,38.617 144.291,37.542 145.368,37.542 146.517,36.394 147.152,36.394 147.496,36.05 C1311_1.2@147.496,35.315
  Top w0.254: R1306_1.2@146.751,25.575 146.751,28.635 147.068,28.952 148.021,28.952 148.386,29.317 148.386,33.35 147.496,34.24 C1311_1.2@147.496,35.315
PRIMARY-C1: C1305_1.1 C1310_1.2 C1311_1.1 IC1400_1.36 R1305_1.2 Z1304_1.2 Z1305_1.1 | length 25.6
  Top w0.152: IC1400_1.36@136.963,42.59 138.385,42.59 139.134,41.84 139.134,38.824 139.595,38.363 143.112,38.363 143.74,37.735 143.74,37.627 144.477,36.89 C1310_1.2@144.936,36.89
  Top w0.254: R1305_1.2@144.211,25.525 144.211,28.031 144.904,28.725 C1305_1.1@145.481,28.725 145.481,29.463 145.116,29.828 Z1305_1.1@145.116,30.54 145.116,31.445 145.846,32.175 145.846,32.368 Z1304_1.2@145.846,33.08 145.846,34.228 146.046,34.428 C1311_1.1@146.046,35.315 146.046,36.412 145.568,36.89 C1310_1.2@145.076,36.89
PRIMARY-C2: C1304_1.1 C1309_1.2 C1310_1.1 IC1400_1.34 R1304_1.2 Z1303_1.2 Z1304_1.1 | length 23.4
  Top w0.152: IC1400_1.34@136.913,41.59 137.715,41.59 138.88,40.425 138.88,38.719 139.49,38.109 143.007,38.109 143.486,37.629 C1310_1.1@143.486,36.89
  Top w0.254: R1304_1.2@141.671,25.525 141.671,28.031 142.364,28.725 C1304_1.1@142.941,28.725 142.941,29.463 143.306,29.828 Z1303_1.2@143.306,30.54 143.306,31.445 142.576,32.175 Z1304_1.1@142.576,33.08 142.576,34.228 142.416,34.388 C1309_1.2@142.416,35.315 142.416,36.452 142.853,36.89 C1310_1.1@143.346,36.89
PRIMARY-C3: C1303_1.1 C1308_1.2 C1309_1.1 IC1400_1.32 R1303_1.2 Z1302_1.2 Z1303_1.1 | length 20
  Top w0.152: IC1400_1.32@134.963,39.14 137.231,39.14 138.516,37.855 139.856,37.855 C1308_1.2@139.856,36.89
  Top w0.254: R1303_1.2@139.131,25.525 139.131,28.031 139.824,28.725 C1303_1.1@140.401,28.725 140.401,29.463 140.036,29.828 Z1303_1.1@140.036,30.54 140.036,31.445 140.766,32.175 Z1302_1.2@140.766,33.08 140.766,34.228 140.966,34.428 C1309_1.1@140.966,35.315 140.966,36.412 140.488,36.89 C1308_1.2@139.856,36.89
PRIMARY-C4: C1302_1.1 C1307_1.2 C1308_1.1 IC1400_1.30 R1302_1.2 Z1301_1.2 Z1302_1.1 | length 19.2
  Top w0.152: IC1400_1.30@133.963,38.49 IC1400_1.30@133.963,39.09 ; IC1400_1.30@133.963,39.14 133.963,38.338 134.447,37.855 135.658,37.855 136.623,36.89 137.773,36.89
  Top w0.254: R1302_1.2@136.591,25.525 136.591,28.031 137.284,28.725 C1302_1.1@137.861,28.725 137.861,29.463 138.226,29.828 Z1301_1.2@138.226,30.54 138.226,31.445 137.496,32.175 Z1302_1.1@137.496,33.08 137.496,34.228 137.348,34.376 C1307_1.2@137.348,35.315 137.348,36.465 137.773,36.89 C1308_1.1@138.266,36.89
PRIMARY-C5: C1301_1.1 C1306_1.2 C1307_1.1 IC1400_1.28 R1301_1.2 Z1300_1.2 Z1301_1.1 | length 16.9
  Top w0.152: IC1400_1.28@132.963,39.09 132.963,38.172 133.281,37.855 133.911,37.855 134.776,36.99 C1306_1.2@134.776,36.89
  Top w0.254: R1301_1.2@134.051,25.525 134.051,28.031 134.744,28.725 C1301_1.1@135.321,28.725 135.321,29.463 134.956,29.828 Z1301_1.1@134.956,30.54 134.956,31.445 135.686,32.175 Z1300_1.2@135.686,33.08 135.686,34.228 135.898,34.441 C1307_1.1@135.898,35.315 135.898,36.345 135.353,36.89 C1306_1.2@134.776,36.89
PRIMARY-C6: C1300_1.1 C1306_1.1 C1323_1.2 IC1400_1.26 R1300_1.2 Z1300_1.1 Z1311_1.2 | length 16.1
  Top w0.152: IC1400_1.26@131.963,39.09 131.963,37.537 132.611,36.89 132.693,36.89
  Top w0.254: R1300_1.2@131.511,25.525 131.511,28.031 132.204,28.725 C1300_1.1@132.781,28.725 132.781,29.463 133.146,29.828 Z1311_1.2@133.146,30.54 133.146,31.445 132.416,32.175 Z1300_1.1@132.416,33.08 132.416,34.228 132.256,34.388 C1323_1.2@132.256,35.315 132.256,36.452 132.693,36.89 C1306_1.1@133.326,36.89
PRIMARY-C7: C1317_1.1 C1322_1.2 C1323_1.1 IC1400_1.24 R1312_1.2 Z1310_1.2 Z1311_1.1 | length 16.1
  Top w0.152: 130.328,36.89 130.328,36.902 130.963,37.537 IC1400_1.24@130.963,39.09
  Top w0.254: R1312_1.2@128.971,25.525 128.971,28.031 129.664,28.725 C1317_1.1@130.241,28.725 130.241,29.463 129.876,29.828 Z1311_1.1@129.876,30.54 129.876,31.445 130.606,32.175 130.606,32.368 Z1310_1.2@130.606,33.08 130.606,34.228 130.806,34.428 C1323_1.1@130.806,35.315 130.806,36.412 130.328,36.89 C1322_1.2@129.696,36.89
PRIMARY-C8: C1316_1.1 C1321_1.2 C1322_1.1 IC1400_1.22 R1311_1.2 Z1309_1.2 Z1310_1.1 | length 16.8
  Top w0.152: C1322_1.1@128.246,36.89 128.82,36.89 129.088,37.158 129.088,37.476 129.963,38.351 IC1400_1.22@129.963,39.09
  Top w0.254: R1311_1.2@126.431,25.525 126.431,28.031 127.124,28.725 C1316_1.1@127.701,28.725 127.701,29.463 128.066,29.828 Z1309_1.2@128.066,30.54 128.066,31.445 127.336,32.175 Z1310_1.1@127.336,33.08 127.336,34.228 127.176,34.388 C1321_1.2@127.176,35.315 127.176,36.452 127.613,36.89 C1322_1.1@128.246,36.89
PRIMARY-C9: C1315_1.1 C1320_1.2 C1321_1.1 IC1400_1.20 R1310_1.2 Z1308_1.2 Z1309_1.1 | length 19.4
  Top w0.152: C1320_1.2@124.616,36.89 124.616,36.99 125.169,37.542 128.334,37.542 128.963,38.172 IC1400_1.20@128.963,39.09
  Top w0.254: R1310_1.2@123.891,25.525 123.891,28.031 124.584,28.725 C1315_1.1@125.161,28.725 125.161,29.463 124.796,29.828 Z1309_1.1@124.796,30.54 124.796,31.445 125.526,32.175 Z1308_1.2@125.526,33.08 125.526,34.228 125.726,34.428 C1321_1.1@125.726,35.315 125.726,36.357 125.193,36.89 C1320_1.2@124.616,36.89
PRIMARY-C10: C1314_1.1 C1319_1.2 C1320_1.1 IC1400_1.18 R1309_1.2 Z1307_1.2 Z1308_1.1 | length 20.6
  Top w0.152: C1320_1.1@123.166,36.89 123.166,36.99 123.719,37.542 124.809,37.542 125.122,37.855 127.721,37.855 127.963,38.097 IC1400_1.18@127.963,39.14 ; IC1400_1.18@127.963,38.49 IC1400_1.18@127.963,39.09
  Top w0.254: R1309_1.2@121.351,25.525 121.351,28.031 122.044,28.725 C1314_1.1@122.621,28.725 122.621,29.463 122.986,29.828 Z1307_1.2@122.986,30.54 122.986,31.445 122.256,32.175 Z1308_1.1@122.256,33.08 122.256,34.228 122.096,34.388 C1319_1.2@122.096,35.315 122.096,36.452 122.533,36.89 C1320_1.1@123.166,36.89
PRIMARY-C11: C1313_1.1 C1318_1.2 C1319_1.1 IC1400_1.16 R1308_1.2 Z1306_1.2 Z1307_1.1 | length 22.8
  Top w0.152: C1318_1.2@119.536,36.89 119.536,36.99 120.089,37.542 122.964,37.542 123.276,37.855 124.616,37.855 125.513,38.752 IC1400_1.16@125.513,41.09
  Top w0.254: R1308_1.2@118.811,25.46 R1308_1.2@118.811,25.525 118.811,28.031 119.504,28.725 C1313_1.1@120.081,28.725 120.081,29.463 119.716,29.828 Z1307_1.1@119.716,30.54 119.716,31.445 120.446,32.175 120.446,32.368 Z1306_1.2@120.446,33.08 120.446,34.228 120.646,34.428 C1319_1.1@120.646,35.315 120.646,36.412 120.168,36.89 C1318_1.2@119.536,36.89
PRIMARY-C12: C1312_1.1 C1318_1.1 C1335_1.2 IC1400_1.14 R1307_1.2 Z1306_1.1 Z1317_1.2 | length 25.1
  Top w0.152: C1318_1.1@118.086,36.89 118.086,36.99 118.639,37.542 119.466,37.542 119.778,37.855 122.641,37.855 122.958,38.172 124.228,38.172 124.546,38.49 124.546,41.965 124.671,42.09 IC1400_1.14@125.463,42.09
  Top w0.254: R1307_1.2@116.271,25.525 116.271,28.024 116.984,28.737 C1312_1.1@117.561,28.737 117.561,29.282 117.926,29.647 Z1317_1.2@117.926,30.552 117.926,31.457 117.176,32.207 117.176,32.368 Z1306_1.1@117.176,33.08 117.176,33.791 117.016,33.951 C1335_1.2@117.016,35.315 117.016,36.495 117.411,36.89 C1318_1.1@117.946,36.89
PRIMARY-C13: C1329_1.1 C1334_1.2 C1335_1.1 IC1400_1.12 R1318_1.2 Z1316_1.2 Z1317_1.1 | length 29.2
  Top w0.152: C1334_1.2@114.476,36.902 114.476,37.002 115.016,37.542 118.196,37.542 118.508,37.855 119.148,37.855 119.466,38.172 122.323,38.172 122.641,38.49 123.911,38.49 124.228,38.807 124.228,42.593 124.725,43.09 IC1400_1.12@125.463,43.09
  Top w0.254: R1318_1.2@113.751,25.46 R1318_1.2@113.751,25.537 113.751,28.044 114.444,28.737 C1329_1.1@115.021,28.737 ; C1334_1.2@114.616,36.902 115.021,36.902 115.566,36.357 C1335_1.1@115.566,35.315 115.566,34.421 115.366,34.22 Z1316_1.2@115.366,33.092 115.366,32.207 115.386,32.187 114.656,31.457 114.656,29.647 115.021,29.282 C1329_1.1@115.021,28.877
PRIMARY-C14: C1328_1.1 C1333_1.2 C1334_1.1 IC1400_1.10 R1317_1.2 Z1315_1.2 Z1316_1.1 | length 31.2
  Top w0.152: C1334_1.1@113.026,36.902 113.026,37.002 113.579,37.555 114.386,37.555 114.686,37.855 117.878,37.855 118.196,38.172 118.831,38.172 119.148,38.49 122.006,38.49 122.323,38.807 123.593,38.807 123.911,39.125 123.911,42.709 124.546,43.344 124.546,43.933 124.702,44.09 IC1400_1.10@125.463,44.09
  Top w0.254: R1317_1.2@111.211,25.46 R1317_1.2@111.211,25.537 111.211,28.044 111.904,28.737 C1328_1.1@112.481,28.737 ; C1328_1.1@112.481,28.877 112.481,29.282 112.846,29.647 112.846,31.457 112.096,32.207 Z1316_1.1@112.096,33.092 112.096,33.804 111.936,33.964 C1333_1.2@111.936,35.315 111.936,36.357 112.481,36.902 C1334_1.1@112.886,36.902
PRIMARY-C15: C1327_1.1 C1332_1.2 C1333_1.1 IC1400_1.8 R1316_1.2 Z1314_1.2 Z1315_1.1 | length 35.5
  Top w0.152: C1332_1.2@109.396,36.902 109.396,37.002 109.931,37.537 112.481,37.537 112.798,37.855 114.068,37.855 114.386,38.172 117.561,38.172 117.878,38.49 118.508,38.49 118.825,38.807 121.688,38.807 122.006,39.125 123.276,39.125 123.593,39.442 123.593,42.871 124.292,43.57 124.292,44.67 124.712,45.09 IC1400_1.8@125.513,45.09
  Top w0.254: R1316_1.2@108.671,25.46 R1316_1.2@108.671,25.537 108.671,28.044 109.364,28.737 C1327_1.1@109.941,28.737 ; C1332_1.2@109.536,36.902 109.941,36.902 110.486,36.357 C1333_1.1@110.486,35.315 110.486,34.421 110.306,34.241 Z1314_1.2@110.306,33.092 110.306,32.381 110.306,32.187 109.576,31.457 109.576,29.647 109.941,29.282 C1327_1.1@109.941,28.877
PRIMARY-C16: C1326_1.1 C1331_1.2 C1332_1.1 IC1400_1.6 R1315_1.2 Z1313_1.2 Z1314_1.1 | length 37.6
  Top w0.152: C1332_1.1@107.946,36.902 107.946,37.002 108.481,37.537 109.039,37.537 109.357,37.855 112.163,37.855 112.481,38.172 113.751,38.172 114.068,38.49 117.243,38.49 117.561,38.807 118.196,38.807 118.513,39.125 121.371,39.125 121.688,39.442 122.958,39.442 123.276,39.76 123.276,42.998 124.038,43.76 124.038,45.416 124.712,46.09 IC1400_1.6@125.513,46.09
  Top w0.254: R1315_1.2@106.131,25.46 R1315_1.2@106.131,25.537 106.131,28.044 106.824,28.737 C1326_1.1@107.401,28.737 ; C1326_1.1@107.401,28.877 107.401,29.282 107.766,29.647 107.766,31.457 107.036,32.187 Z1314_1.1@107.036,33.092 107.036,34.241 106.856,34.421 C1331_1.2@106.856,35.315 106.856,36.357 107.401,36.902 C1332_1.1@107.806,36.902
PRIMARY-C17: C1325_1.1 C1330_1.2 C1331_1.1 IC1400_1.4 R1314_1.2 Z1312_1.2 Z1313_1.1 | length 41.9
  Top w0.152: C1330_1.2@104.316,36.902 104.316,37.002 104.851,37.537 107.401,37.537 107.718,37.855 108.671,37.855 108.988,38.172 111.846,38.172 112.163,38.49 113.433,38.49 113.751,38.807 116.926,38.807 117.243,39.125 117.878,39.125 118.196,39.442 121.053,39.442 121.371,39.76 122.641,39.76 122.958,40.077 122.958,43.04 123.784,43.865 123.784,46.162 124.712,47.09 IC1400_1.4@125.513,47.09
  Top w0.254: R1314_1.2@103.591,25.46 R1314_1.2@103.591,25.537 103.591,28.044 104.284,28.737 C1325_1.1@104.861,28.737 ; C1330_1.2@104.456,36.902 104.861,36.902 105.406,36.357 C1331_1.1@105.406,35.315 105.406,34.421 105.226,34.241 Z1312_1.2@105.226,33.092 105.226,32.381 105.226,32.187 104.496,31.457 104.496,29.647 104.861,29.282 C1325_1.1@104.861,28.877
PRIMARY-C18: C1324_1.1 C1330_1.1 IC1400_1.2 R1313_1.2 Z1312_1.1 | length 43.9
  Top w0.152: C1330_1.1@102.866,36.902 102.866,37.002 103.401,37.537 103.908,37.537 104.226,37.855 107.083,37.855 107.401,38.172 108.353,38.172 108.671,38.49 111.528,38.49 111.846,38.807 113.116,38.807 113.433,39.125 116.608,39.125 116.926,39.442 117.561,39.442 117.787,39.669 120.952,39.669 121.287,40.003 122.471,40.003 122.763,40.294 122.763,43.158 123.474,43.869 123.474,47.769 123.795,48.09 IC1400_1.2@125.513,48.09
  Top w0.254: R1313_1.2@101.051,25.537 101.051,28.044 101.744,28.737 C1324_1.1@102.321,28.737 ; C1324_1.1@102.321,28.877 102.321,31.457 101.956,31.822 Z1312_1.1@101.956,33.092 101.956,33.804 102.866,34.714 C1330_1.1@102.866,36.902
PRIMARY-DIGITAL-IO_0: R700_1.1 U700_1.4 | length 7.2
  Top w0.152: U700_1.4@82.311,12.13 82.711,12.13 86.995,16.414 86.995,16.7 ; 86.996,16.701 R700_1.1@86.996,17.153
PRIMARY-DIGITAL-IO_1: R701_1.1 U700_1.5 | length 5.9
  Top w0.152: U700_1.5@82.311,12.78 82.711,12.78 85.407,15.476 85.407,16.7 ; 85.408,16.701 R701_1.1@85.408,17.153
PRIMARY-DIGITAL-IO_2: R702_1.1 U700_1.6 | length 4.6
  Top w0.152: U700_1.6@82.311,13.43 82.711,13.43 83.82,14.539 83.82,16.7 ; 83.821,16.701 R702_1.1@83.821,17.153
PRIMARY-DIGITAL-IO_3: R703_1.1 U700_1.7 | length 4.2
  Top w0.152: R703_1.1@82.233,17.153 82.233,16.192 83.344,15.081 83.344,14.713 82.711,14.08 U700_1.7@82.311,14.08
PRIMARY-DIGITAL-IO_4: R704_1.1 U700_1.9 | length 5.6
  Top w0.152: U700_1.9@76.611,14.73 79.182,14.73 80.645,16.192 80.645,16.7 ; 80.646,16.701 R704_1.1@80.646,17.153
PRIMARY-DIGITAL-IO_5: R705_1.1 U700_1.10 | length 6.5
  Top w0.152: U700_1.10@76.611,14.08 75.909,14.08 75.724,14.265 75.724,15.24 76.359,15.875 78.581,15.875 79.058,16.352 R705_1.1@79.058,17.153
PRIMARY-DIGITAL-IO_6: R706_1.1 U700_1.11 | length 5.6
  Top w0.152: U700_1.11@76.611,13.43 76.211,13.43 75.406,14.234 75.406,15.569 76.99,17.153 R706_1.1@77.471,17.153
PRIMARY-DIGITAL-IO_7: R707_1.1 U700_1.12 | length 5.7
  Top w0.152: R707_1.1@75.883,17.153 75.883,16.511 75.089,15.716 75.089,13.6 75.909,12.78 U700_1.12@76.611,12.78
PRIMARY-GPIO1-OPT: R1408_1.1 R1425_1.1 | length 170.2
  Top w0.152: R1408_1.1@141.438,56.111 v1(142.326,56.111)
  Top w0.203: v1@10.754,24.329 R1425_1.1@10.754,25.153
  Signals2 w0.203: v1(10.738,24.329) 16.864,24.329 18.732,26.198 v2@18.732,30.051
  Signals1 w0.152: v1(29.613,56.905) 29.613,58.048 34.041,62.476 138.333,62.476 142.721,58.087 142.721,56.507 v1(142.326,56.111)
  Bottom w0.152: v2(18.732,30.004) 18.732,32.635 20.002,33.905 23.164,33.905 24.513,35.255 24.513,47.685 24.831,48.002 29.276,48.003 29.593,48.32 29.613,48.34 v1(29.613,56.905)
PRIMARY-GPIO2-OPT: R1410_1.1 R1426_1.1 | length 175.6
  Top w0.152: R1410_1.1@141.438,51.507 142.293,51.507 v1(142.306,51.495)
  Top w0.203: v1@9.357,24.329 R1426_1.1@9.357,25.153
  Signals2 w0.203: v1(9.341,24.329) 9.341,24.821 9.883,25.364 12.246,25.364 13.222,26.339 13.222,26.855 13.562,27.195 14.487,28.12 14.533,28.12 14.67,28.258 v2(14.764,28.258)
  Signals1 w0.152: v1(28.981,57.54) 29.359,57.918 29.359,58.153 33.936,62.73 138.438,62.73 142.975,58.192 142.975,51.847 142.623,51.495 v1(142.306,51.495)
  Bottom w0.152: v2(14.764,28.258) 15.081,28.575 15.081,31.903 17.338,34.159 23.059,34.159 24.196,35.296 24.196,48.002 24.513,48.32 28.641,48.32 28.958,48.637 28.981,48.659 v1(28.981,57.54)
PRIMARY-GPIO3-OPT: R1412_1.1 R1427_1.1 | length 184.9
  Top w0.152: R1412_1.1@141.438,48.332 142.03,48.332 142.306,48.056 v1(142.306,47.443)
  Top w0.203: v1@7.96,24.329 R1427_1.1@7.96,25.153
  Signals2 w0.203: v1(7.944,24.329) 7.944,24.948 8.969,25.973 11.994,25.973 12.383,26.362 12.383,27.94 12.065,28.258 12.065,28.575 12.587,29.097 13.064,29.097 v2(13.652,29.686)
  Signals1 w0.152: v1(28.343,58.81) 29.657,58.81 33.831,62.984 138.543,62.984 143.258,58.268 143.258,48.637 142.306,47.685 v1(142.306,47.443)
  Bottom w0.152: v2@13.811,29.686 14.605,29.686 14.608,29.689 14.608,34.287 14.734,34.413 22.953,34.413 23.878,35.338 23.878,48.32 24.196,48.637 28.006,48.637 28.323,48.953 28.343,48.973 v1(28.343,58.81)
PRIMARY-GPIO4-OPT: R1414_1.1 | length 1.5
  Top w0.152: R1414_1.1@141.438,44.998 141.438,45.098 142.306,45.966 v1(142.306,46.097)
PRIMARY-GPIO5-OPT: R1416_1.1 | length 1.2
  Top w0.152: R1416_1.1@141.438,41.907 141.438,42.007 142.167,42.736 v1(142.167,42.776)
PRIMARY-GPIO6: IC1400_1.44 R1421_1.1 | length 14.9
  Top w0.152: IC1400_1.44@136.963,46.59 138.036,46.59 v1(138.198,46.427) 138.982,46.427 139.386,46.023 140.298,46.023 140.86,45.461 140.86,44.612 141.273,44.198 v2@142.068,44.198 ; v1(143.85,43.57) 145.141,43.57 146.54,42.171 R1421_1.1@149.692,42.171
  Bottom w0.152: v2(142.232,44.183) 142.845,43.57 v1(143.85,43.57)
PRIMARY-GPIO7: IC1400_1.45 R1422_1.1 | length 14.9
  Top w0.152: IC1400_1.45@136.913,47.09 138.067,47.09 138.094,47.063 138.553,47.063 ; IC1400_1.45@136.963,47.09 IC1400_1.45@136.99,47.063 ; 138.554,47.063 v1@138.832,47.063 ; v1(138.833,47.062) 139.678,46.217 140.513,46.217 140.619,46.112 140.745,46.112 140.812,46.046 140.812,45.919 v1(140.929,46.036) ; v1(145.481,44.014) 147.153,44.014 148.676,45.537 R1422_1.1@149.692,45.537
  Signals2 w0.152: v1(140.929,46.036) 141.068,46.036 142.963,44.141 145.354,44.141 v1(145.481,44.014)
PRIMARY-GPIO8: IC1400_1.46 R1423_1.1 | length 24.2
  Top w0.152: IC1400_1.46@136.963,47.59 138.296,47.59 v1(138.323,47.617) ; v1(138.296,48.743) 137.991,49.048 137.778,49.048 137.453,49.372 137.453,51.229 138.828,52.604 139.253,52.604 139.275,52.626 142.323,52.626 142.88,53.182 142.88,54.386 143.431,54.936 144.356,54.936 148.93,50.362 148.93,47.951 148.635,47.657 R1423_1.1@148.138,47.657
  Bottom w0.152: v1(138.296,48.743) 138.296,47.801 138.302,47.794 v1@138.313,47.794
PRIMARY-GPIO9: IC1400_1.47 R1424_1.1 | length 140.8
  Top w0.152: IC1400_1.47@136.913,48.09 137.715,48.09 137.798,48.172 v1(138.833,48.172) ; v1(145.247,50.999) 147.15,50.999 148.138,50.011 R1424_1.1@148.138,49.191
  Signals2 w0.152: v1(140.802,49.365) 140.997,49.365 142.076,48.286 142.535,48.286 145.247,50.997 v1(145.247,50.999)
  Signals1 w0.152: v1(32.788,49.92) 32.708,50 32.708,54.296 32.234,54.77 32.234,57.134 36.305,61.206 135.238,61.206 140.802,55.642 v1(140.802,49.365) 139.609,48.172 v1(138.833,48.172)
PRIMARY-IN+: TP1405_1.1 TR1400_1.4 X500.2 X500.4 | length 17
  Top w0.152: TP1405_1.1@43.596,5.946 43.596,5.298 44.06,4.835 X500.2@44.06,3.143 X500.4@46.6,3.143
  Top w0.254: TR1400_1.4@33.967,8.73 33.967,7.625 34.217,7.375 42.167,7.375 TP1405_1.1@43.596,5.946
PRIMARY-IN-: TP1404_1.1 TR1400_1.6 X500.1 X500.3 | length 24.4
  Top w0.254: TR1400_1.6@38.074,8.73 42.222,8.73 45.006,5.946 ; X500.1@42.79,-1.357 47.235,-1.357 48.187,-0.404 48.187,4.517 47.711,4.993 45.33,4.993 45.012,5.311 45.006,5.311 45.006,5.946 ; TP1404_1.1@46.441,5.946 45.006,5.946
PRIMARY-LTC-DRIVE: IC1400_1.49 R605_1.1 R610_1.2 | length 42.5
  Top w0.152: R605_1.1@103.591,38.425 104.478,38.425 104.861,38.807 R610_1.2@104.861,40.012 105.412,40.012 105.665,39.76 105.958,39.76 v1@106.045,39.846 ; v1(129.308,41.347) 134.146,41.347 134.963,42.165 134.963,47.973 135.018,48.028 135.018,48.487 134.963,48.541 IC1400_1.49@134.963,50.54 ; IC1400_1.49@134.963,50.59 IC1400_1.49@134.998,50.555
  Signals2 w0.152: v1(106.131,39.76) 106.448,39.442 106.766,39.442 125.498,39.442 127.403,41.347 v1(129.308,41.347)
PRIMARY-MUX-DATA_TEMP: C106_1.2 R108_1.2 R1409_1.1 | length 67.2
  Top w0.254: R108_1.2@100.64,19.598 101.368,19.598 v1(104.385,16.582) ; R1409_1.1@141.438,53.253 141.438,54.081 141.463,54.106 C106_1.2@141.463,54.682 ; R1409_1.1@141.488,53.253 142.159,53.253 142.179,53.273 v1(142.326,53.412)
  Signals2 w0.254: v1(104.385,16.582) 104.861,16.582 128.991,40.712 v1(129.943,40.712) ; v1(137.881,40.069) 139.887,42.076 139.887,50.021 142.326,52.46 v1(142.326,53.412)
  Signals1 w0.254: v1(129.943,40.712) 129.943,40.077 130.578,39.442 137.253,39.442 v1(137.881,40.069)
PRIMARY-MUX-DATA_USER: C107_1.2 R109_1.2 R1411_1.1 | length 133.5
  Top w0.152: R109_1.2@21.423,61.032 C107_1.2@22.856,61.032 22.856,61.895 v1(23.263,62.302) ; R1411_1.1@141.438,50.332 142.198,50.332 142.326,50.46 v1(142.326,50.618)
  Signals2 w0.152: v1(23.263,62.302) 26.045,59.52 26.438,59.52 142.197,59.508 142.88,58.825 142.88,51.173 v1(142.326,50.618)
PRIMARY-OUT+: TP1406_1.1 TR1400_1.1 X501.2 X501.4 | length 15.1
  Top w0.152: X501.2@33.9,3.143 X501.4@36.44,3.143
  Top w0.254: TR1400_1.1@27.947,8.73 27.947,7.771 28.241,7.477 32.368,7.477 33.9,5.946 ; X501.2@33.9,3.143 33.9,5.946 ; TP1406_1.1@35.963,5.946 33.9,5.946